# Altium PCB BOARD.PcbDoc
Units mm, origin at the board's own origin, x right, y up, seen from the top; angles counter-clockwise.
Board outline 80 x 40 mm, 2 copper layers (Top Layer, Bottom Layer), stack 1.18 mm thick; 120 components, 56 nets, 306 pads, 130 vias.
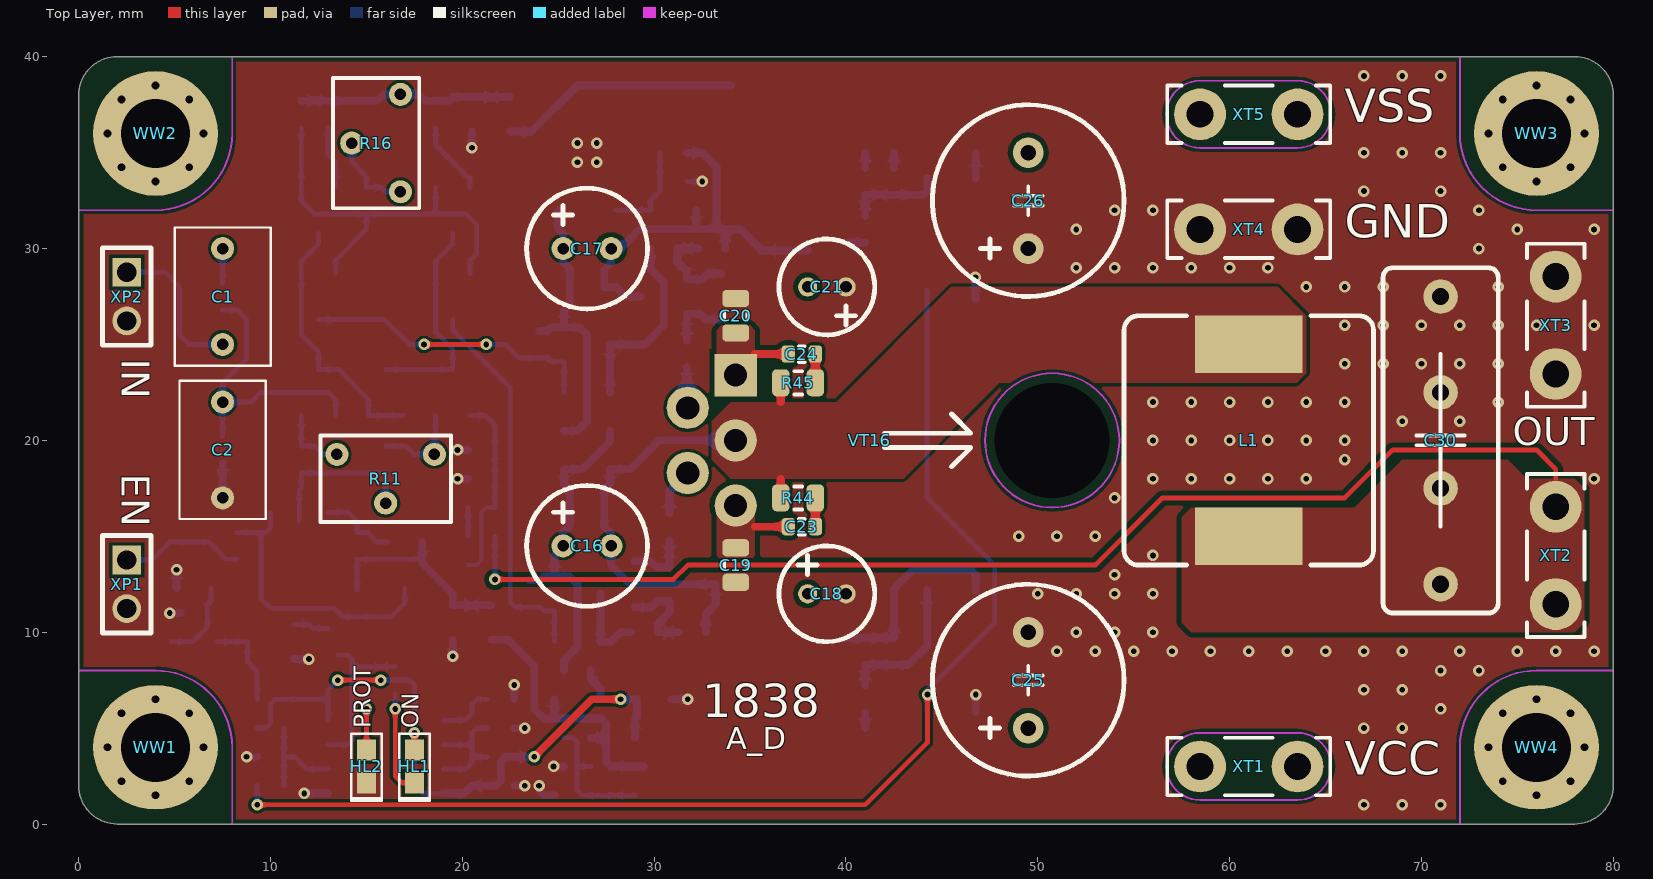
[diagram p0: Top Layer view]
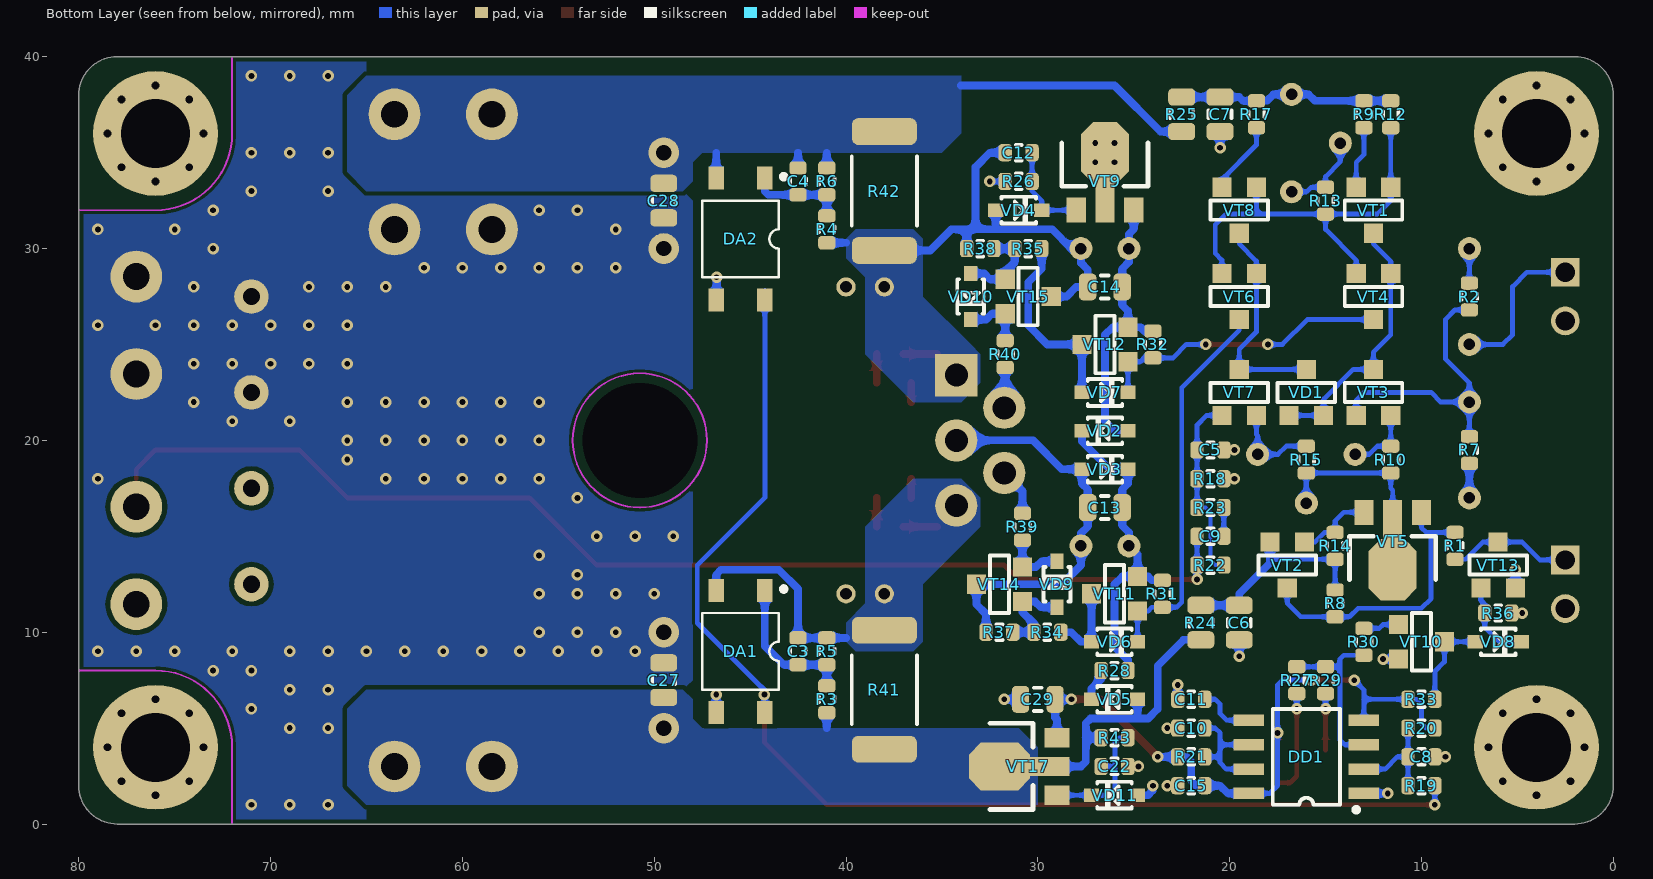
[diagram p1: Bottom Layer view, seen from below]
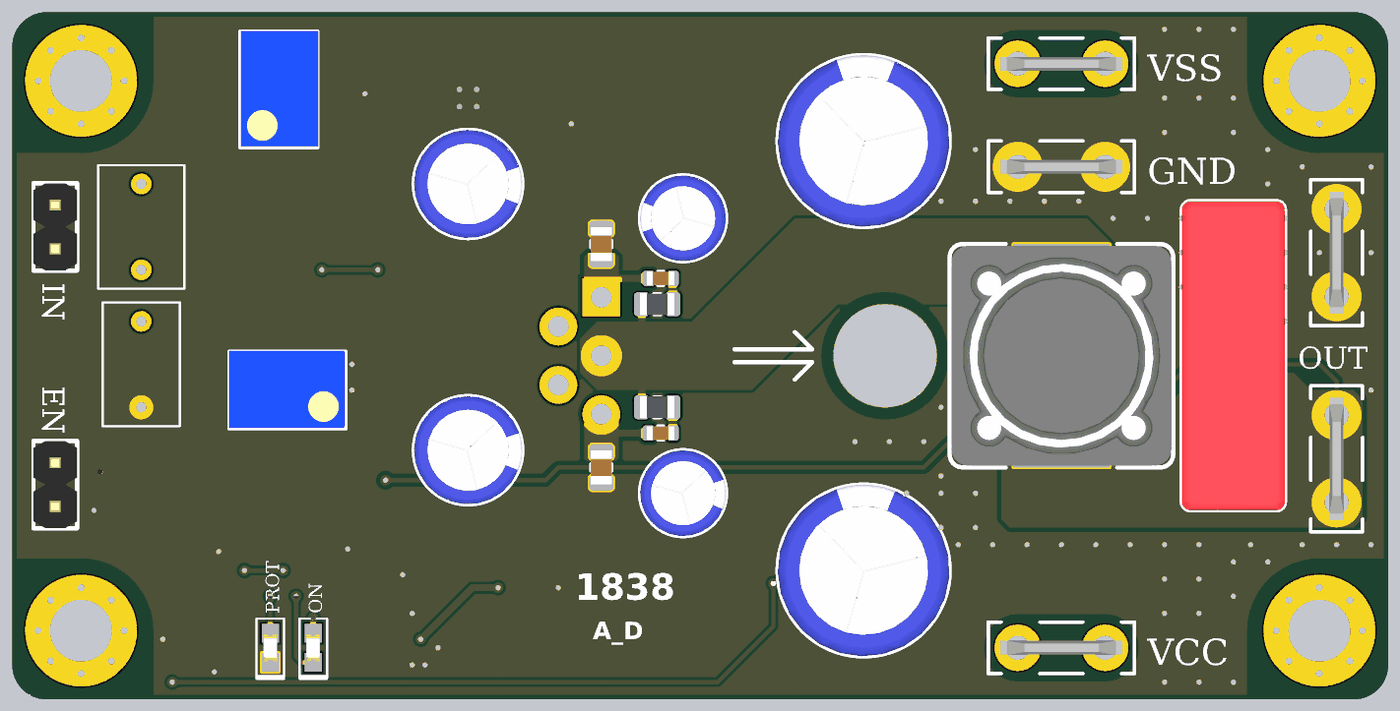
[diagram p2: 3D render of the assembled board from above, using the file's embedded part models]
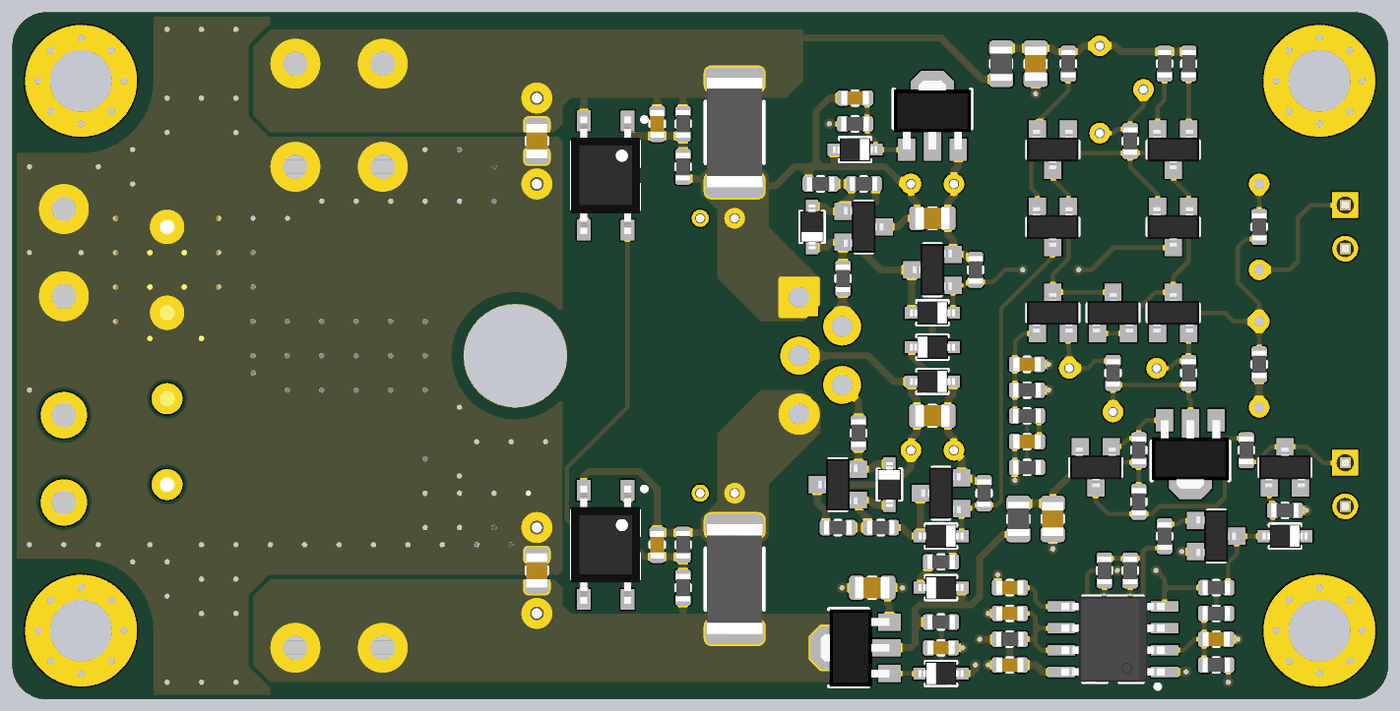
[diagram p3: 3D render of the assembled board from below, using the file's embedded part models]

## Layer stack, top to bottom
Top Solder: solder mask 0.01, Solder Resist, Dk 3.5
Top Layer: signal copper 0.03
Dielectric1: core 1.12, FR-4, Dk 4.2
Bottom Layer: signal copper 0.03
Bottom Solder: solder mask 0.01, Solder Resist, Dk 3.5

## Board outline
0,2 0,38 cw(c2,38) 2,40 78,40 cw(c78,38) 80,38 80,2 cw(c78,2) 78,0 2,0 cw(c2,2)

## Design rules (kind name [scope] priority, off if disabled: settings)
BoardOutlineClearance [All] p1: gap=0.25 ignorepadtopadclearanceinfootprint=FALSE
Clearance "Schematic Clearance Constraint_4" [InNet('VSS')] p1: gap=0.25 ignorepadtopadclearanceinfootprint=FALSE except(0: Arc-Hole Track-Hole SMDPad-Hole THPad-Hole Via-Hole Fill-Hole Poly-Hole Region-Hole Text-Hole)
Clearance "Schematic Clearance Constraint_3" [InNet('VSS_PROT')] p2: gap=0.25 ignorepadtopadclearanceinfootprint=FALSE except(0: Arc-Hole Track-Hole SMDPad-Hole THPad-Hole Via-Hole Fill-Hole Poly-Hole Region-Hole Text-Hole)
Clearance "Schematic Clearance Constraint_2" [InNet('VCC_PROT')] p3: gap=0.25 ignorepadtopadclearanceinfootprint=FALSE except(0: Arc-Hole Track-Hole SMDPad-Hole THPad-Hole Via-Hole Fill-Hole Poly-Hole Region-Hole Text-Hole)
Clearance "Schematic Clearance Constraint_1" [InNet('OUT_LP')] p4: gap=0.25 ignorepadtopadclearanceinfootprint=FALSE except(0: Arc-Hole Track-Hole SMDPad-Hole THPad-Hole Via-Hole Fill-Hole Poly-Hole Region-Hole Text-Hole)
Clearance "Schematic Clearance Constraint" [InNet('VCC')] p5: gap=0.25 ignorepadtopadclearanceinfootprint=FALSE except(0: Arc-Hole Track-Hole SMDPad-Hole THPad-Hole Via-Hole Fill-Hole Poly-Hole Region-Hole Text-Hole)
Clearance [All] p6: gap=0.152 ignorepadtopadclearanceinfootprint=FALSE
ComponentClearance [All] p1 off: gap=0.25 collisioncheckmode=3 verticalgap=0.25 showdistances=FALSE
DiffPairsRouting [All] p1: maxlimit=0.4 minlimit=0.15 mostfreqgap=0.25 toplayer_minwidth=0.2 toplayer_maxwidth=0.4 toplayer_prefwidth=0.25 bottomlayer_minwidth=0.2 bottomlayer_maxwidth=0.4 bottomlayer_prefwidth=0.25 maxuncoupledlength=12
Height [All] p1: minheight=0 maxheight=25 prefheight=25
HoleSize [All] p1: absolutevalues=TRUE maxlimit=6 minlimit=0.3 maxpercent=80.000 minpercent=20.000
HoleToHoleClearance [All] p1: gap=0.25 allowstackedmicrovias=TRUE
MinimumSolderMaskSliver [All] p1 off: minsoldermaskwidth=0.254
PlaneClearance [All] p1: clearance=0.5
PlaneConnect [All] p1: planeconnectstyle=Relief reliefexpansion=0.5 reliefentries=4 reliefconductorwidth=0.25 reliefairgap=0.25
PolygonConnect "Schematic Polygon Connect Style_7" [InNet('GND')] p1: connectstyle=Direct reliefconductorwidth=0.254 reliefentries=4 polygonreliefangle="45 Angle" airgapwidth=0.254
PolygonConnect "Schematic Polygon Connect Style_3" [InNet('OUT_LP')] p2: connectstyle=Direct reliefconductorwidth=0.254 reliefentries=4 polygonreliefangle="45 Angle" airgapwidth=0.254
PolygonConnect "Schematic Polygon Connect Style_6" [InNet('VCC')] p3: connectstyle=Direct reliefconductorwidth=0.254 reliefentries=4 polygonreliefangle="45 Angle" airgapwidth=0.254
PolygonConnect "Schematic Polygon Connect Style_5" [InNet('VSS_PROT')] p4: connectstyle=Direct reliefconductorwidth=0.254 reliefentries=4 polygonreliefangle="45 Angle" airgapwidth=0.254
PolygonConnect "Schematic Polygon Connect Style_4" [InNet('VSS')] p5: connectstyle=Direct reliefconductorwidth=0.254 reliefentries=4 polygonreliefangle="45 Angle" airgapwidth=0.254
PolygonConnect "Schematic Polygon Connect Style_1" [InNet('VCC_PROT')] p6: connectstyle=Direct reliefconductorwidth=0.254 reliefentries=4 polygonreliefangle="45 Angle" airgapwidth=0.254
PolygonConnect PolygonConnect_DirectConnect [InComponentClass('DirectConnect')] p7: connectstyle=Direct reliefconductorwidth=0.254 reliefentries=4 polygonreliefangle="90 Angle" airgapwidth=0.254
PolygonConnect PolygonConnect_Components [InComponent('C*') OR InComponent('R*') OR InComponent('NR*') OR InComponent('DA*') OR InComponent('DD*') OR InComponent('HL*')] p8: connectstyle=Relief reliefconductorwidth=0.2 reliefentries=4 polygonreliefangle="90 Angle" airgapwidth=0.25
PolygonConnect PolygonConnect_Connectors [All vs (InPadClass('All Pads'))] p9: connectstyle=Relief reliefconductorwidth=0.6 reliefentries=4 polygonreliefangle="90 Angle" airgapwidth=0.3
PolygonConnect PolygonConnect_Via [All] p10: connectstyle=Direct reliefconductorwidth=0.254 reliefentries=4 polygonreliefangle="90 Angle" airgapwidth=0.254
RoutingCorners [All] p1: cornerstyle=45-Degree minsetback=1.5 maxsetback=3.5
RoutingVias [All] p1: holewidth=0.6 width=1.2 viastyle="Through Hole" minholewidth=0.3 minwidth=0.6 maxholewidth=1 maxwidth=2
SMDEntry [All] p1: side=TRUE corner=TRUE anyangle=TRUE
SilkToSilkClearance [All] p1 off: silktosilkclearance=0.254
SilkToSolderMaskClearance [IsPad] p1 off: minsilkscreentomaskgap=0.254 clearancetoexposedcopper=TRUE
SolderMaskExpansion [All] p1: expansion=0.1
Width [All] p1: maxlimit=8 minlimit=0.2 preferedwidth=0.6
Width Width_TrackEnds [All] p2 off: maxlimit=0.25 minlimit=0.25 preferedwidth=0.25 checkconnectedcopper=TRUE
19 further rules are at their usual default settings.

## Classes and differential pairs
component class DirectConnect: C18 C19 C20 C21 C25 C26 C30 L1 VT16 XT1 XT2 XT3 XT4 XT5

## Components (designator, comment, footprint, x,y, rotation, side; value= is the part's Value field where it differs from the comment)
C1 "Capacitor" CAPF_050D500P720X500X1000 7.5,27.5 r90 top value=2.2uF
C2 "Capacitor" CAPF_050D500P720X450X600 7.5,19.5 r90 top value=100pF
C3 "Capacitor" C0603_L 42.5,9 r270 bottom value=1800pF
C4 "Capacitor" C0603_L 42.5,33.5 r270 bottom value=1800pF
C5 "Capacitor" C0603_L 21,19.5 r0 bottom value=22pF
C6 "Capacitor" C0805_L 19.5,10.5 r90 bottom value=0.1uF
C7 "Capacitor" C0805_L 20.5,37 r90 bottom value=0.1uF
C8 "Capacitor" C0603_L 10,3.5 r0 bottom value=0.47uF
C9 "Capacitor" C0603_L 21,15 r0 bottom value=22pF
C10 "Capacitor" C0603_L 22,5 r180 bottom value=1uF
C11 "Capacitor" C0603_L 22,6.5 r180 bottom value=1uF
C12 "Capacitor" C0603_L 31,35 r180 bottom value=1uF
C13 "Capacitor" C0805_L 26.5,16.5 r180 bottom value=0.1uF
C14 "Capacitor" C0805_L 26.5,28 r180 bottom value=0.1uF
C15 "Capacitor" C0603_L 22,2 r180 bottom value=0.47uF
C16 "Capacitor-E" CAPE_040D250P630X1100 26.5,14.5 r0 top value=100uF
C17 "Capacitor-E" CAPE_040D250P630X1100 26.5,30 r0 top value=100uF
C18 "Capacitor-E" CAPE_040D200P500X1100 39,12 r0 top value=22uF
C19 "Capacitor" C0805_L 34.25,13.5 r270 top value=0.1uF
C20 "Capacitor" C0805_L 34.25,26.5 r90 top value=0.1uF
C21 "Capacitor-E" CAPE_040D200P500X1100 39,28 r180 top value=22uF
C22 "Capacitor" C0603_L 26,3 r0 bottom value=1uF
C23 "Capacitor" C0603_L 37.7,15.5 r0 top value=100pF
C24 "Capacitor" C0603_L 37.7,24.5 r0 top value=100pF
C25 "Capacitor-E" CAPE_060D500P1000X2000 49.5,7.5 r90 top value=470uF
C26 "Capacitor-E" CAPE_060D500P1000X2000 49.5,32.5 r90 top value=470uF
C27 "Capacitor" C0805_L 49.5,7.5 r90 bottom value=0.1uF
C28 "Capacitor" C0805_L 49.5,32.5 r90 bottom value=0.1uF
C29 "Capacitor" C0805_L 30,6.5 r180 bottom value=10uF
C30 "Capacitor" CAPF_080D1500P1800X600X1250 71,20 r270 top value=0.68uF
DA1 "Photocoupler-4p" SOP-4_254P430X440X200_N 45.5,9 r0 bottom value=SFH690CT
DA2 "Photocoupler-4p" SOP-4_254P430X440X200_N 45.5,30.5 r0 bottom value=SFH690CT
DD1 "TIM-555" SOIC-8_127P490X391X155_N 16,3.5 r90 bottom value=NE555D
HL1 "ON" LD0603 17.5,3 r270 top value=BL-LS0603GC
HL2 "PROT" LD0603 15,3 r270 top value=BL-LS0603EC
L1 "Coil" B82477G4-Series 61,20 r270 top value=B82477G4103M000
R1 "Resistor" R0603_L 8.25,14.5 r270 bottom value=47k
R2 "Resistor" R0603_L 7.5,27.5 r270 bottom value=1k
R3 "Resistor" R0603_L 41,6.5 r90 bottom value=470
R4 "Resistor" R0603_L 41,31 r90 bottom value=470
R5 "Resistor" R0603_L 41,9 r270 bottom value=10k
R6 "Resistor" R0603_L 41,33.5 r270 bottom value=10k
R7 "Resistor" R0603_L 7.5,19.5 r90 bottom value=1.5k
R8 "Resistor" R0603_L 14.5,11.5 r90 bottom value=47k
R9 "Resistor" R0603_L 13,37 r270 bottom value=51
R10 "Resistor" R0603_L 11.6,19 r270 bottom value=47
R11 "Resistor-Trimmer-1" 3266W 16,18 r180 top value=500
R12 "Resistor" R0603_L 11.6,37 r270 bottom value=330
R13 "Resistor" R0603_L 15,32.5 r90 bottom value=100
R14 "Resistor" R0603_L 14.5,14.5 r270 bottom value=220
R15 "Resistor" R0603_L 16,19 r90 bottom value=47
R16 "Resistor-Trimmer-1" 3266W 15.5,35.5 r90 top value=5k
R17 "Resistor" R0603_L 18.6,37 r270 bottom value=51
R18 "Resistor" R0603_L 21,18 r0 bottom value=1.5k
R19 "Resistor" R0603_L 10,2 r0 bottom value=10
R20 "Resistor" R0603_L 10,5 r0 bottom value=1meg
R21 "Resistor" R0603_L 22,3.5 r180 bottom value=1meg
R22 "Resistor" R0603_L 21,13.5 r0 bottom value=8.2k
R23 "Resistor" R0603_L 21,16.5 r180 bottom value=1k
R24 "Resistor" R0805_L 21.5,10.5 r270 bottom value=10
R25 "Resistor" R0805_L 22.5,37 r270 bottom value=10
R26 "Resistor" R0603_L 31,33.5 r180 bottom value=8.2k
R27 "Resistor" R0603_L 16.5,7.5 r270 bottom value=2.2k
R28 "Resistor" R0603_L 26,8 r0 bottom value=4.7k
R29 "Resistor" R0603_L 15,7.5 r270 bottom value=2.2k
R30 "Resistor" R0603_L 13,9.5 r90 bottom value=10k
R31 "Resistor" R0603_L 23.5,12 r90 bottom value=470
R32 "Resistor" R0603_L 24,25 r90 bottom value=470
R33 "Resistor" R0603_L 10,6.5 r0 bottom value=22k
R34 "Resistor" R0603_L 29.5,10 r0 bottom value=30
R35 "Resistor" R0603_L 30.5,30 r0 bottom value=30
R36 "Resistor" R0603_L 6,11 r0 bottom value=10k
R37 "Resistor" R0603_L 32,10 r180 bottom value=390
R38 "Resistor" R0603_L 33,30 r180 bottom value=390
R39 "Resistor" R0603_L 30.8,15.5 r90 bottom value=0
R40 "Resistor" R0603_L 31.7,24.5 r270 bottom value=0
R41 "Resistor" R2512_L 38,7 r270 bottom value=0.33
R42 "Resistor" R2512_L 38,33 r270 bottom value=0.33
R43 "Resistor" R0603_L 26,4.5 r0 bottom value=8.2k
R44 "Resistor" R0805_L 37.5,17 r0 top value=10
R45 "Resistor" R0805_L 37.5,23 r180 top value=10
VD1 "Schottky_AC" SOT-23_190P290X160X145_N 16,22.5 r180 bottom value=BAT54S
VD2 "Diode" SOD-323 26.5,20.5 r0 bottom value=BAS316
VD3 "Zener" SOD-323 26.5,18.5 r180 bottom value=BZX384-C12
VD4 "Zener" SOD-323 31,32 r180 bottom value=BZX384-C12
VD5 "Diode" SOD-323 26,6.5 r0 bottom value=1N4148WS-7-F
VD6 "Diode" SOD-323 26,9.5 r180 bottom value=BAS316
VD7 "Diode" SOD-323 26.5,22.5 r180 bottom value=BAS316
VD8 "Diode" SOD-323 6,9.5 r180 bottom value=1N4148WS-7-F
VD9 "Diode" SOD-323 29,12.5 r90 bottom value=BAS316
VD10 "Diode" SOD-323 33.5,27.5 r270 bottom value=BAS316
VD11 "Zener" SOD-323 26,1.5 r0 bottom value=BZX384-C12
VT1 "BJT-NPN" SOT-23_190P290X160X145_N 12.5,32 r0 bottom value=BC847
VT2 "BJT-PNP" SOT-23_190P290X160X145_N 17,13.5 r0 bottom value=BC857
VT3 "BJT-PNP" SOT-23_190P290X160X145_N 12.5,22.5 r180 bottom value=MMBT5401
VT4 "BJT-NPN" SOT-23_190P290X160X145_N 12.5,27.5 r0 bottom value=MMBT5551
VT5 "BJT-PNP" SOT-89_150P460X260X170_N 11.5,14.5 r0 bottom value=BCX53
VT6 "BJT-NPN" SOT-23_190P290X160X145_N 19.5,27.5 r0 bottom value=MMBT5551
VT7 "BJT-PNP" SOT-23_190P290X160X145_N 19.5,22.5 r180 bottom value=MMBT5401
VT8 "BJT-NPN" SOT-23_190P290X160X145_N 19.5,32 r0 bottom value=BC847
VT9 "BJT-NPN" SOT-89_150P460X260X170_N 26.5,33.75 r180 bottom value=BCX56
VT10 "BJT-NPN" SOT-23_190P290X160X145_N 10,9.5 r270 bottom value=BC847
VT11 "BJT-PNP" SOT-23_190P290X160X145_N 26,12 r90 bottom value=BC807
VT12 "BJT-PNP" SOT-23_190P290X160X145_N 26.5,25 r90 bottom value=BC807
VT13 "BJT-NPN" SOT-23_190P290X160X145_N 6,13.5 r180 bottom value=BC847
VT14 "BJT-PNP" SOT-23_190P290X160X145_N 32,12.5 r90 bottom value=BC807
VT15 "BJT-PNP" SOT-23_190P290X160X145_N 30.5,27.5 r270 bottom value=BC807
VT16 "IRFI4212H-117P" TO-220-5-117-WB 42,20 r270 top locked
VT17 "BJT-NPN" SOT-89_150P460X260X170_N 30.75,3 r90 bottom value=BCX56
WW1 "NoBody" MH_M3.0 4,4 r0 top locked value=MOUNTINGHOLE
WW2 "NoBody" MH_M3.0 4,36 r0 top locked value=MOUNTINGHOLE
WW3 "NoBody" MH_M3.0 76,36 r0 top locked value=MOUNTINGHOLE
WW4 "NoBody" MH_M3.0 76,4 r0 top locked value=MOUNTINGHOLE
XP1 "EN" PLS-2 2.5,12.5 r270 top value=PLS-2
XP2 "IN" PLS-2 2.5,27.5 r270 top value=PLS-2
XT1 "VCC" 62650-1 61,3 r180 top value=62650-1
XT2 "OUT" 62650-1 77,14 r90 top value=62650-1
XT3 "GND" 62650-1 77,26 r270 top value=62650-1
XT4 "GND" 62650-1 61,31 r180 top value=62650-1
XT5 "VSS" 62650-1 61,37 r180 top value=62650-1

## Footprints (in the part's own frame and the unit in brackets; to place one, negate y for a bottom-side part, rotate by r counter-clockwise, add the part's x,y. Pads: shape width x height; smd on the part's side, far side on the other; paste and mask are expansions set on the pad)
3266W [mm]
  round 1.2 hole 0.6: 1(-2.54,-1.27) 2(0,1.27) 3(2.54,-1.27)
  silkscreen extent -3.4,-2.25 3.4,2.25, body extent -3.31,-2.29 3.39,2.2, height 8.35
62650-1 [mm]
  round 2.7 hole 1.4: 1(-2.54,0) 1(2.54,0)
  silkscreen extent -4.25,-1.5 4.25,1.5, body extent -3.56,-0.4 3.56,0.4, height 9.25
B82477G4-Series [mm] "Epcos"
  rect 3x5.6 smd: 1(-5,0) 2(5,0)
  silkscreen extent -6.5,-6.5 6.5,6.5, body extent -6.4,-6.4 6.4,6.4, height 8
C0603_L [mm] "Chip Capacitor; Body 1.6 x 0.8 mm (LxW typ)"
  rrect50% 0.7x0.9 smd: 1(-0.7,0) 2(0.7,0)
  silkscreen extent -0.15,-0.41 0.15,0.41, body extent -0.8,-0.4 0.8,0.4, height 0.91
C0805_L [mm] "Chip Capacitor; Body 2.0 x 1.2 mm (LxW typ)"
  rrect50% 0.9x1.4 smd: 1(-0.9,0) 2(0.9,0)
  silkscreen extent -0.2,-0.6 0.2,0.6, body extent -1,-0.62 1,0.63, height 1.01
CAPE_040D200P500X1100 [mm]
  round 1 hole 0.6: 1(-1,0) 2(1,0)
  silkscreen extent -2.5,-2.5 2.5,2.5, body extent -2.5,-2.5 2.5,2.5, height 11.1
CAPE_040D250P630X1100 [mm]
  round 1.2 hole 0.6: 1(-1.25,0) 2(1.25,0)
  silkscreen extent -3.15,-3.15 3.15,3.15, body extent -3.15,-3.15 3.15,3.15, height 11.1
CAPE_060D500P1000X2000 [mm]
  round 1.6 hole 0.8: 1(-2.5,0) 2(2.5,0)
  silkscreen extent -5,-5 5,5, body extent -5,-5 5,5, height 20.1
CAPF_050D500P720X450X600 [mm]
  round 1.2 hole 0.6: 1(-2.5,0) 2(2.5,0)
  silkscreen extent -3.6,-2.25 3.6,2.25, body extent -3.5,-2.25 3.5,2.25, height 6
CAPF_050D500P720X500X1000 [mm]
  round 1.2 hole 0.6: 1(-2.5,0) 2(2.5,0)
  silkscreen extent -3.6,-2.5 3.6,2.5, body extent -3.5,-2.5 3.5,2.5, height 10
CAPF_080D1500P1800X600X1250 [mm]
  round 1.8 hole 0.9: 1(-7.5,0) 2(7.5,0)
  silkscreen extent -9,-3 9,3, body extent -9,-3 9,3, height 12.55
LD0603 [mm]
  rect 1.1x1 smd: 1(-0.85,0) 2(0.85,0)
  silkscreen extent -1.7,-0.8 1.8,0.8, body extent -0.8,-0.4 0.8,0.4, height 0.7
MH_M3.0 [mm] "Mounting hole M3"
  round 0.4 hole 0.4 paste-10: MH(-2.5,0) MH(-1.768,1.768) MH(-1.768,-1.768) MH(0,2.5) MH(0,-2.5) MH(1.768,1.768) MH(1.768,-1.768) MH(2.5,0)
  round 6.5 hole 3.6 paste-10: MH(0,0)
PLS-2 [mm]
  rect 1.5x1.5 hole 1: 1(-1.27,0)
  round 1.5 hole 1: 2(1.27,0)
  silkscreen extent -2.54,-1.27 2.54,1.27, body extent -2.54,-1.27 2.54,1.27, height 8.9
R0603_L [mm] "Chip Resistor; Body 1.6 x 0.8 mm (LxW typ)"
  rrect50% 0.7x0.9 smd: 1(-0.7,0) 2(0.7,0)
  silkscreen extent -0.15,-0.41 0.15,0.41, body extent -0.8,-0.41 0.8,0.41, height 0.46
R0805_L [mm] "Chip Resistor; Body 2.0 x 1.2 mm (LxW typ)"
  rrect50% 0.9x1.4 smd: 1(-0.9,0) 2(0.9,0)
  silkscreen extent -0.2,-0.6 0.2,0.6, body extent -1,-0.64 1,0.64, height 0.61
R2512_L [mm] "6432M"
  rrect50% 1.4x3.4 smd: 1(-3.1,0) 2(3.1,0)
  silkscreen extent -1.8,-1.7 1.8,1.7, body extent -3.2,-1.61 3.2,1.61, height 0.61
SOD-323 [mm]
  rect 0.8x0.7 smd: 1(-1.2,0) 2(1.2,0)
  silkscreen extent -0.9,-0.7 0.9,0.7, body extent -1.3,-0.67 1.3,0.68, height 1.1
SOIC-8_127P490X391X155_N [mm] "4320.8-А Small Outline; 8 Leads; Body Width 3.9 mm; Pitch 1.27 mm"
  rect 0.6x1.6 smd: 1(-1.905,-3) 2(-0.635,-3) 3(0.635,-3) 4(1.905,-3) 5(1.905,3) 6(0.635,3) 7(-0.635,3) 8(-1.905,3)
  silkscreen extent -2.88,-2.72 2.5,1.75, body extent -2.5,-3.01 2.5,3.01, height 1.75
SOP-4_254P430X440X200_N [mm]
  rect 0.8x1.2 smd: 1(-1.27,-3.175) 2(1.27,-3.175) 3(1.27,3.175) 4(-1.27,3.175)
  silkscreen extent -2.37,-3.37 2,2, body extent -2,-3.43 2,3.43, height 2.04
SOT-23_190P290X160X145_N [mm] "КТ-46"
  rect 1x1 smd: 1(-0.9,-1.2) 2(0,1.2) 3(0.9,-1.2)
  silkscreen extent -1.5,-0.5 1.5,0.5, body extent -1.5,-1.15 1.5,1.15, height 1.11
SOT-89_150P460X260X170_N [mm]
  rect 1x1.3 smd: 1(-1.5,-1.75) 3(1.5,-1.75)
  rect 1x2.2 smd: 2(0,-1.3)
  oct 2.5x3.2 smd: 2(0,1.25)
  silkscreen extent -2.25,-0.5 2.25,1.75, body extent -2.25,-1.75 2.25,2.25, height 1.51
TO-220-5-117-WB [mm] "PENTAWATT, 1501.5-3, Horizontal Mount"
  round 0.1 hole 6: 0(0,8.75)
  rect 2.2x2.2 hole 1.2: 1(-3.4,-7.75)
  round 2.2 hole 1.2: 2(-1.7,-10.25) 3(0,-7.75) 4(1.7,-10.25) 5(3.4,-7.75)
  body extent -5,-4.25 5,11.75, height 4.83

## Part data
C1: library part MKS2B042201F00JSSD, Dielectric Type="PET Film", Manufacturer=WIMA, Tolerance=±5%, Voltage=50V, Working Temperature Max=+100°С, Working Temperature Min=-55°С, Application Category=1, ID=1, Part Number=MKS2B042201F00JSSD, Published=18.05.2010, Publisher="Andrew Danich", Type=Конденсатор
C2: library part FKP2D001001D00JSSD, Dielectric Type="PET Film", Manufacturer=WIMA, Tolerance=±5%, Voltage=100V, Working Temperature Max=+100°С, Working Temperature Min=-55°С, Application Category=1, ID=3, Part Number=FKP2D001001D00JSSD, Published=18.05.2010, Publisher="Andrew Danich", Type=Конденсатор
C3 C4: library part GRM188R71H182JA01D, Dielectric Type=X7R, Manufacturer=Murata, Tolerance=±5%, Voltage=50V, Working Temperature Max=+125°С, Working Temperature Min=-55°С, Application Category=1, ID=208, Part Number=GRM188R71H182JA01D, Published=18.05.2010, Publisher="Andrew Danich", Type=Конденсатор
C5 C9: library part GRM1885C1H220JA01D, Dielectric Type=NP0, Manufacturer=Murata, Tolerance=±5%, Voltage=50V, Working Temperature Max=+125°С, Working Temperature Min=-55°С, Application Category=1, ID=122, Part Number=GRM1885C1H220JA01D, Published=18.05.2010, Publisher="Andrew Danich", Type=Конденсатор
C6 C7 C13 C14 C19 C20 C27 C28: library part GCJ21BR72A104KA01L, Dielectric Type=X7R, Manufacturer=Murata, Tolerance=±10%, Voltage=100V, Working Temperature Max=+125°С, Working Temperature Min=-55°С, Application Category=1, ID=138, Part Number=GCJ21BR72A104KA01L, Published=18.05.2010, Publisher="Andrew Danich", Type=Конденсатор
  C19 C20: ClassName=DirectConnect
C8 C15: library part GCJ188R71C474KA12D, Dielectric Type=X7R, Manufacturer=Murata, Tolerance=±10%, Voltage=16V, Working Temperature Max=+125°С, Working Temperature Min=-55°С, Application Category=1, ID=133, Part Number=GCJ188R71C474KA12D, Published=18.05.2010, Publisher="Andrew Danich", Type=Конденсатор
C10 C11 C12 C22: library part GCM188R71E105KA64D, Dielectric Type=X7R, Manufacturer=Murata, Tolerance=±10%, Voltage=25V, Working Temperature Max=+85°С, Working Temperature Min=-55°С, Application Category=1, ID=134, Part Number=GCM188R71E105KA64D, Published=18.05.2010, Publisher="Andrew Danich", Type=Конденсатор
C16 C17: library part TKR101M1VE11, Manufacturer=Jamicon, Tolerance=±20%, Voltage=35V, Working Temperature Max=+105°С, Working Temperature Min=-55°С, Application Category=1, ID=2, Part Number=TKR101M1VE11, Published=20.08.2010, Publisher="Andrew Danich", Type=Конденсатор
C18 C21: library part TKR220M1JD11, Manufacturer=Jamicon, Tolerance=±20%, Voltage=63V, Working Temperature Max=+105°С, Working Temperature Min=-55°С, Application Category=1, ClassName=DirectConnect, ID=4, Part Number=TKR220M1JD11, Published=20.08.2010, Publisher="Andrew Danich", Type=Конденсатор
C23 C24: library part GCM1885C2A101JA16D, Dielectric Type=NP0, Manufacturer=Murata, Tolerance=±5%, Voltage=100V, Working Temperature Max=+125°С, Working Temperature Min=-55°С, Application Category=1, ID=155, Part Number=GCM1885C2A101JA16D, Published=18.05.2010, Publisher="Andrew Danich", Type=Конденсатор
C25 C26: library part TKR471M1HG20, Manufacturer=Jamicon, Tolerance=±20%, Voltage=50V, Working Temperature Max=+105°С, Working Temperature Min=-55°С, Application Category=1, ClassName=DirectConnect, ID=3, Part Number=TKR471M1HG20, Published=20.08.2010, Publisher="Andrew Danich", Type=Конденсатор
C29: library part GRM21BR61E106KA73L, Dielectric Type=X5R, Manufacturer=Murata, Tolerance=±10%, Voltage=25V, Application Category=1, ID=53, Part Number=GRM21BR61E106KA73L, Published=18.05.2010, Publisher="Andrew Danich", Type=Конденсатор
C30: library part MKS4D036804C00KSP1, Dielectric Type="PET Film", Manufacturer=WIMA, Tolerance=±5%, Voltage=100V, Working Temperature Max=+100°С, Working Temperature Min=-55°С, Application Category=1, ClassName=DirectConnect, ID=4, Part Number=MKS4D036804C00KSP1, Published=18.05.2010, Publisher="Andrew Danich", Type=Конденсатор
DA1 DA2: library part SFH690CT, Current Transfer Ratio=100…200%, Input Current=50mA, Input Voltage=1.4V, Manufacturer="Vishay Semiconductors", Output Voltage=70V, Total Power Dissipation=150mW, Working Temperature Max=+100°С, Working Temperature Min=-55°С, Application Category=1, ID=8, Output Current=50mA, Part Number=SFH690CT, Published=09.01.2017, Publisher="Andrew Danich", Type=Микросхема
DD1: library part NE555D, Manufacturer="Texas Instruments", Output Current=200mA, Supply Current=15mA, Application Category=1, Functional Analog="SA555D, SE555D", ID=2, Part Number=NE555D, Published=07.08.2015, Publisher="Andrew Danich", Series Type="Timer 555", Supply Operation=+4.5…16V, Type=Микросхема, № of Elements=1
HL1: library part BL-LS0603GC, Color=Green, Forward Current=30mA, Forward Voltage=2.3V, Power Dissipation=65mW, Application Category=1, ID=14, Leds=1, Part Number=BL-LS0603GC, Published=03.12.2013, Publisher="Andrew Danich", Type="Индикатор единичный"
HL2: library part BL-LS0603EC, Color=Orange, Forward Current=30mA, Forward Voltage=2.1V, Power Dissipation=65mW, Application Category=1, ID=15, Leds=1, Part Number=BL-LS0603EC, Published=03.12.2013, Publisher="Andrew Danich", Type="Индикатор единичный"
L1: library part B82477G4103M000, DC Resistance=0.022ohm, Inductance=10uH, Manufacturer=Epcos, Rated Current=5.4A, Tolerance=±20%, Working Temperature Max=+125°С, Working Temperature Min=-55°С, Application Category=1, ClassName=DirectConnect, ID=27, Part Number=B82477G4103M000, Published=20.05.2010, Publisher="Andrew Danich", Type=Дроссель
R1 R8: library part RC0603JR-0747KL, Limit Voltage=50V, Manufacturer=Yageo, Temperature Coefficient=100ppm, Tolerance=±5%, Total Power Dissipation=0.1W, Working Temperature Max=+155°С, Working Temperature Min=-55°С, Application Category=1, ID=63, Part Number=RC0603JR-0747KL, Published=24.03.2010, Publisher="Andrew Danich", Series Type=Thick-Film, Type=Резистор
R2 R23: library part RC0603JR-071KL, Limit Voltage=50V, Manufacturer=Yageo, Temperature Coefficient=100ppm, Tolerance=±5%, Total Power Dissipation=0.1W, Working Temperature Max=+155°С, Working Temperature Min=-55°С, Application Category=1, Functional Analog=CR0603-JW-102E, ID=19, Part Number=RC0603JR-071KL, Published=24.03.2010, Publisher="Andrew Danich", Series Type=Thick-Film, Type=Резистор
R3 R4 R31 R32: library part RC0603JR-07470R, Limit Voltage=50V, Manufacturer=Yageo, Temperature Coefficient=100ppm, Tolerance=±5%, Total Power Dissipation=0.1W, Working Temperature Max=+155°С, Working Temperature Min=-55°С, Application Category=1, ID=61, Part Number=RC0603JR-07470R, Published=24.03.2010, Publisher="Andrew Danich", Series Type=Thick-Film, Type=Резистор
R5 R6 R30 R36: library part RC0603JR-0710KL, Limit Voltage=50V, Manufacturer=Yageo, Temperature Coefficient=100ppm, Tolerance=±5%, Total Power Dissipation=0.1W, Working Temperature Max=+155°С, Working Temperature Min=-55°С, Application Category=1, Functional Analog=CR0603-JW-103E, ID=12, Part Number=RC0603JR-0710KL, Published=24.03.2010, Publisher="Andrew Danich", Series Type=Thick-Film, Type=Резистор
R7 R18: library part RC0603JR-071K5L, Limit Voltage=50V, Manufacturer=Yageo, Temperature Coefficient=100ppm, Tolerance=±5%, Total Power Dissipation=0.1W, Working Temperature Max=+155°С, Working Temperature Min=-55°С, Application Category=1, ID=8, Part Number=RC0603JR-071K5L, Published=24.03.2010, Publisher="Andrew Danich", Series Type=Thick-Film, Type=Резистор
R9 R17: library part RC0603JR-0751RL, Limit Voltage=50V, Manufacturer=Yageo, Temperature Coefficient=100ppm, Tolerance=±5%, Total Power Dissipation=0.1W, Working Temperature Max=+155°С, Working Temperature Min=-55°С, Application Category=1, Functional Analog=CR0603-JW-510E, ID=314, Part Number=RC0603JR-0751RL, Published=24.03.2010, Publisher="Andrew Danich", Series Type=Thick-Film, Type=Резистор
R10 R15: library part RC0603JR-0747RL, Limit Voltage=50V, Manufacturer=Yageo, Temperature Coefficient=100ppm, Tolerance=±5%, Total Power Dissipation=0.1W, Working Temperature Max=+155°С, Working Temperature Min=-55°С, Application Category=1, ID=60, Part Number=RC0603JR-0747RL, Published=24.03.2010, Publisher="Andrew Danich", Series Type=Thick-Film, Type=Резистор
R11: library part 3266W-1-501, Limit Voltage=250V, Manufacturer=Bourns, Temperature Coefficient=100ppm, Tolerance=±10%, Total Power Dissipation=0.25W, Working Temperature Max=+125°С, Working Temperature Min=-55°С, Application Category=1, Channel=1, Functional Analog=3266X-1-501LF, ID=5, Part Number=3266W-1-501, Published=27.07.2015, Publisher="Andrew Danich", Taper Type=Linear, Type="Подстроечный резистор"
R12: library part RC0603JR-07330RL, Limit Voltage=50V, Manufacturer=Yageo, Temperature Coefficient=100ppm, Tolerance=±5%, Total Power Dissipation=0.1W, Working Temperature Max=+155°С, Working Temperature Min=-55°С, Application Category=1, Functional Analog=CR0603-JW-331E, ID=313, Part Number=RC0603JR-07330RL, Published=24.03.2010, Publisher="Andrew Danich", Series Type=Thick-Film, Type=Резистор
R13: library part RC0603JR-07100R, Limit Voltage=50V, Manufacturer=Yageo, Temperature Coefficient=100ppm, Tolerance=±5%, Total Power Dissipation=0.1W, Working Temperature Max=+155°С, Working Temperature Min=-55°С, Application Category=1, Functional Analog=CR0603-JW-101E, ID=10, Part Number=RC0603JR-07100R, Published=24.03.2010, Publisher="Andrew Danich", Series Type=Thick-Film, Type=Резистор
R14: library part RC0603JR-07220R, Limit Voltage=50V, Manufacturer=Yageo, Temperature Coefficient=100ppm, Tolerance=±5%, Total Power Dissipation=0.1W, Working Temperature Max=+155°С, Working Temperature Min=-55°С, Application Category=1, ID=30, Part Number=RC0603JR-07220R, Published=24.03.2010, Publisher="Andrew Danich", Series Type=Thick-Film, Type=Резистор
R16: library part 3266W-1-502, Limit Voltage=250V, Manufacturer=Bourns, Temperature Coefficient=100ppm, Tolerance=±10%, Total Power Dissipation=0.25W, Working Temperature Max=+125°С, Working Temperature Min=-55°С, Application Category=1, Channel=1, Functional Analog=3266X-1-501LF, ID=6, Part Number=3266W-1-502, Published=27.07.2015, Publisher="Andrew Danich", Taper Type=Linear, Type="Подстроечный резистор"
R19: library part RC0603JR-0710RL, Limit Voltage=50V, Manufacturer=Yageo, Temperature Coefficient=100ppm, Tolerance=±5%, Total Power Dissipation=0.1W, Working Temperature Max=+155°С, Working Temperature Min=-55°С, Application Category=1, Functional Analog=CR0603-JW-100E, ID=9, Part Number=RC0603JR-0710RL, Published=24.03.2010, Publisher="Andrew Danich", Series Type=Thick-Film, Type=Резистор
R20 R21: library part RC0603JR-071ML, Limit Voltage=50V, Manufacturer=Yageo, Temperature Coefficient=100ppm, Tolerance=±5%, Total Power Dissipation=0.1W, Working Temperature Max=+155°С, Working Temperature Min=-55°С, Application Category=1, ID=20, Part Number=RC0603JR-071ML, Published=24.03.2010, Publisher="Andrew Danich", Series Type=Thick-Film, Type=Резистор
R22 R26 R43: library part RC0603JR-078K2L, Limit Voltage=50V, Manufacturer=Yageo, Temperature Coefficient=100ppm, Tolerance=±5%, Total Power Dissipation=0.1W, Working Temperature Max=+155°С, Working Temperature Min=-55°С, Application Category=1, ID=82, Part Number=RC0603JR-078K2L, Published=24.03.2010, Publisher="Andrew Danich", Series Type=Thick-Film, Type=Резистор
R24 R25 R44 R45: library part RC0805JR-0710RL, Limit Voltage=150V, Manufacturer=Yageo, Temperature Coefficient=100ppm, Tolerance=±5%, Total Power Dissipation=0.125W, Working Temperature Max=+155°С, Working Temperature Min=-55°С, Application Category=1, ID=96, Part Number=RC0805JR-0710RL, Published=24.03.2010, Publisher="Andrew Danich", Series Type=Thick-Film, Type=Резистор
R27 R29: library part RC0603JR-072K2L, Limit Voltage=50V, Manufacturer=Yageo, Temperature Coefficient=100ppm, Tolerance=±5%, Total Power Dissipation=0.1W, Working Temperature Max=+155°С, Working Temperature Min=-55°С, Application Category=1, ID=22, Part Number=RC0603JR-072K2L, Published=24.03.2010, Publisher="Andrew Danich", Series Type=Thick-Film, Type=Резистор
R28: library part RC0603JR-074K7L, Limit Voltage=50V, Manufacturer=Yageo, Temperature Coefficient=100ppm, Tolerance=±5%, Total Power Dissipation=0.1W, Working Temperature Max=+155°С, Working Temperature Min=-55°С, Application Category=1, ID=56, Part Number=RC0603JR-074K7L, Published=24.03.2010, Publisher="Andrew Danich", Series Type=Thick-Film, Type=Резистор
R33: library part RC0603JR-0722KL, Limit Voltage=50V, Manufacturer=Yageo, Temperature Coefficient=100ppm, Tolerance=±5%, Total Power Dissipation=0.1W, Working Temperature Max=+155°С, Working Temperature Min=-55°С, Application Category=1, ID=32, Part Number=RC0603JR-0722KL, Published=24.03.2010, Publisher="Andrew Danich", Series Type=Thick-Film, Type=Резистор
R34 R35: library part RC0603JR-0730RL, Limit Voltage=50V, Manufacturer=Yageo, Temperature Coefficient=100ppm, Tolerance=±5%, Total Power Dissipation=0.1W, Working Temperature Max=+155°С, Working Temperature Min=-55°С, Application Category=1, ID=412, Part Number=RC0603JR-0730RL, Published=24.03.2010, Publisher="Andrew Danich", Series Type=Thick-Film, Type=Резистор
R37 R38: library part RC0603FR-07390RL, Limit Voltage=50V, Manufacturer=Yageo, Temperature Coefficient=100ppm, Tolerance=±1%, Total Power Dissipation=0.1W, Working Temperature Max=+155°С, Working Temperature Min=-55°С, Application Category=1, ID=306, Part Number=RC0603FR-07390RL, Published=24.03.2010, Publisher="Andrew Danich", Series Type=Thick-Film, Type=Резистор
R39 R40: library part RC0603JR-070R, Limit Voltage=50V, Manufacturer=Yageo, Temperature Coefficient=100ppm, Tolerance=±5%, Total Power Dissipation=0.1W, Working Temperature Max=+155°С, Working Temperature Min=-55°С, Application Category=1, Functional Analog="RC0603FR-070RL, CR0603-J/-000E", ID=5, Part Number=RC0603JR-070R, Published=24.03.2010, Publisher="Andrew Danich", Series Type=Thick-Film, Type=Резистор
R41 R42: library part RL2512FK-070R33L, Limit Voltage=200V, Manufacturer=Yageo, Temperature Coefficient=100ppm, Tolerance=±1%, Total Power Dissipation=1W, Working Temperature Max=+155°С, Working Temperature Min=-55°С, Application Category=1, ID=220, Part Number=RL2512FK-070R33L, Published=24.03.2010, Publisher="Andrew Danich", Series Type=Thick-Film, Type=Резистор
VD1: library part BAT54S, Capacitance=10pF, Forward Current=200mA, Forward Voltage=0.5V, Manufacturer="NXP Semiconductors", Max Operating Frequency=5nS, Reverse Current=2uA, Reverse Voltage=30V, Total Power Dissipation=290mW, Working Temperature Max=+150°С, Working Temperature Min=-55°С, Application Category=1, ID=14, Part Number=BAT54S, Published=08.08.2014, Publisher="Andrew Danich", Type="Сборка диодная"
VD2 VD6 VD7 VD9 VD10: library part BAS316, Forward Current=250mA, Manufacturer=NXP, Reverse Current=0.5uA, Reverse Voltage=100V, Total Power Dissipation=400mW, Application Category=1, ID=14, Part Number=BAS316, Published=18.05.2010, Publisher="Andrew Danich", Recovery Time=4nS, Type=Диод
VD3 VD4 VD11: library part BZX384-C12, Capacitance=85pF, Differential resistance=150ohm, Forward Current=250mA, Forward Voltage=0.9V, Manufacturer=NXP, Reverse Current=0.1uA, Total Power Dissipation=300mW, Working Temperature Max=+150°С, Working Temperature Min=-65°С, Working Voltage=12V, Application Category=1, ID=20, Part Number=BZX384-C12, Published=20.05.2013, Publisher="Andrew Danich", Type=Стабилитрон
VD5 VD8: library part 1N4148WS-7-F, Capacitance=2pF, Forward Current=150mA, Forward Voltage=1V, Manufacturer="Diodes Incorporated", Reverse Current=1uA, Reverse Voltage=100V, Total Power Dissipation=200mW, Working Temperature Max=+150°С, Working Temperature Min=-55°С, Application Category=1, Functional Analog=1N4148WS, ID=13, Part Number=1N4148WS-7-F, Published=18.05.2010, Publisher="Andrew Danich", Recovery Time=4nS, Type=Диод
VT1 VT8 VT10 VT13: library part BC847, C-E Saturation Voltage=0.6V, C-E Voltage=45V, Collector Current=100mA, DC Current Gain=110…800, Total Power Dissipation=250mW, Transition Frequency=100MHz, Application Category=1, ID=1, Part Number=BC847, Published=07.05.2013, Publisher="Andrew Danich", Type=Транзистор
VT2: library part BC857, C-E Saturation Voltage=0.6V, C-E Voltage=45V, Collector Current=100mA, DC Current Gain=125…800, Total Power Dissipation=250mW, Transition Frequency=100MHz, Application Category=1, ID=2, Part Number=BC857, Published=07.05.2013, Publisher="Andrew Danich", Type=Транзистор
VT3 VT7: library part MMBT5401, C-E Saturation Voltage=0.5V, C-E Voltage=160V, Collector Current=600mA, DC Current Gain=60…240, Total Power Dissipation=350mW, Transition Frequency=100MHz, Application Category=1, ID=8, Part Number=MMBT5401, Published=07.05.2013, Publisher="Andrew Danich", Type=Транзистор
VT4 VT6: library part MMBT5551, C-E Saturation Voltage=0.2V, C-E Voltage=160V, Collector Current=600mA, DC Current Gain=50…250, Total Power Dissipation=350mW, Transition Frequency=100MHz, Application Category=1, ID=7, Part Number=MMBT5551, Published=07.05.2013, Publisher="Andrew Danich", Type=Транзистор
VT5: library part BCX53, C-E Voltage=80V, Collector Current=1A, Application Category=1, ID=4, Part Number=BCX53, Published=07.05.2013, Publisher="Andrew Danich", Type=Транзистор
VT9 VT17: library part BCX56, C-E Voltage=80V, Collector Current=1A, Application Category=1, ID=3, Part Number=BCX56, Published=07.05.2013, Publisher="Andrew Danich", Type=Транзистор
VT11 VT12 VT14 VT15: library part BC807, C-E Saturation Voltage=0.7V, C-E Voltage=45V, Collector Current=500mA, DC Current Gain=100…600, Manufacturer=NXP, Total Power Dissipation=250mW, Transition Frequency=80MHz, Working Temperature Max=+150°С, Working Temperature Min=-65°С, Application Category=1, Functional Analog=BC807-40, ID=15, Part Number=BC807, Published=07.05.2013, Publisher="Andrew Danich", Type=Транзистор
VT16: D-S On-Resistance=0.058omh, D-S Voltage=100V, Drain Current=11A, Gate Capacitance=490pF, Gate Threshold Voltage=5V, Manufacturer=Infineon, Thermal Resistance to Case=7.1°C/W, Total Power Dissipation=18W, Working Temperature Max=+150°C, Working Temperature Min=-55°C, Application Category=1, ClassName=DirectConnect, ID=1, Part Number=IRFI4212H-117P, Published=14.09.2018, Publisher="Andrew Danich", Type="Сборка транзисторная"
WW1 WW2 WW3 WW4: library part MOUNTINGHOLE, ID=1, Part Number=MOUNTINGHOLE, Published=24.03.2015, Publisher="Andrew Danich", Type=Лепесток
XP1 XP2: library part PLS-2, Limit Current=3A, Limit Voltage=250V, Resistance=15momh, Application Category=1, Connector Type=Male, ID=1, Part Number=PLS-2, Pins=2, Pitch=2.54mm, Published=07.03.2013, Publisher="Andrew Danich", Surface Finish=Gold, Type=Вилка
XT1 XT2 XT3 XT4 XT5: library part 62650-1, Manufacturer="TE Connectivity", Application Category=1, ClassName=DirectConnect, ID=20, Part Number=62650-1, Pins=2, Pitch=5.08mm, Published=27.07.2015, Publisher="Andrew Danich", Type="Клеммный соединитель"

## Free pads (board coordinates)
  round 1.8 hole 0.9: 0(71,17.5) 0(71,22.5)

## Via types
v1: diameter 0.6, hole 0.3, Top Layer to Bottom Layer, tented both sides, 130 vias

## Nets (pads, with @x,y where several pads share a name; then routed paths per layer and width w, separated by ;. In a path a pad name is that pad's centre, name@x,y a point inside that pad or via, vN(x,y) a via of type N, cw(c..) or ccw(c..) an arc to the next point about the centre after c; other vN are vias at no path point)
EN: R1.2 VT13.2 XP1.1 | length 6.5
  Bottom Layer w0.25: XP1.1 3.82,13.77 4.75,14.7 VT13.2 6.8,14.7 7.7,13.8 R1.2
GND: C2.1 C5.1 C6.1 C7.1 C8.1 C10.1 C11.1 C15.1 C18.2 C19.2 C20.2 C21.1 C22.1 C25.2 C26.1 C27.2 C28.1 C29.1 C30.1 DA1.3 DA2.3 DD1.1 HL2.2 pad.0@71,22.5 R7.1 R18.1 R26.1 R36.1 VD11.1 VT9.2 VT10.3 VT13.3 XP1.2 XP2.2 XT3.1 XT4.1 | length 16
  Bottom Layer w0.25: R26.1 v1(32.5,33.5)
  Bottom Layer w0.4: v1(4.75,11) R36.1 ; VT13.3 v1(5.1,13.25) ; C2.1 R7.1 ; v1(8.75,3.5) C8.1 ; VT10.3 v1(12,8.6) ; v1(11.75,1.595) DD1.1 ; v1(19.5,8.75) C6.1 ; v1(19.75,18) R18.1 ; v1(19.75,19.5) C5.1 ; v1(20.5,35.25) C7.1 ; C15.1 v1(23.25,2) ; C10.1 v1(23.25,5) ; C11.1 v1(22.7,7.25) ; v1(24,2) 24,1.75 24.25,1.5 VD11.1 ; v1(24.754,3) C22.1 ; C29.1 v1(31.75,6.5) ; v1(46.75,28.5) 46.75,27.345 DA2.3 ; DA1.3 v1(46.77,6.75)
  other v1: 67,1 69,1 71,1 67,5 69,5 71,6 67,7 69,7 71,8 73,8 51,9 53,9 55,9 57,9 59,9 61,9 63,9 65,9 67,9 69,9 72,9 75,9 77,9 79,9 52,10 54,10 56,10 50,12 52,12 54,12 56,12 54,13 56,14 49,15 51,15 53,15 54,17 56,18 58,18 60,18 62,18 64,18 79,18 66,19 56,20 58,20 60,20 62,20 64,20 66,20 69,21 72,21 56,22 58,22 60,22 62,22 64,22 66,22 74,22 66,24 68,24 70,24 72,24 74,24 66,26 68,26 70,26 72,26 74,26 76,26 79,26 64,28 66,28 68,28 74,28 52,29 54,29 56,29 58,29 60,29 62,29 73,30 52,31 75,31 79,31 54,32 56,32 73,32 67,33 71,33 26,34.5 27,34.5 67,35 69,35 71,35 26,35.5 27,35.5 67,39 69,39 71,39
NetC1_1: C1.1 XP2.1 | length 8
  Bottom Layer w0.25: XP2.1 4.5,28.77 5.25,28.02 5.25,25.5 5.75,25 C1.1
NetC1_2: C1.2 R2.1 | length 1.8
  Bottom Layer w0.25: R2.1 C1.2
NetC2_2: C2.2 R2.2 R7.2 VT3.1 | length 15.1
  Bottom Layer w0.25: R7.2 C2.2 ; R2.2 8.25,26.8 8.75,26.3 8.75,24.25 7.5,23 C2.2 ; VT3.1 13.4,22.1 13,22.5 9.5,22.5 9,22 C2.2
NetC3_2: C3.2 DA1.1 R3.2 R5.2 | length 7.6
  Bottom Layer w0.4: R3.2 R5.2 C3.2 43.25,8.3 44.23,9.28 DA1.1
NetC4_2: C4.2 DA2.1 R4.2 R6.2 | length 5.1
  Bottom Layer w0.4: R4.2 R6.2 C4.2 44.05,32.8 44.23,32.98 DA2.1
NetC5_2: C5.2 R18.2 R22.1 R23.1 VT7.1 | length 9.9
  Bottom Layer w0.2: R22.1 20.75,13.5 21,13.75 21,16.25 21.25,16.5 R23.1
  Bottom Layer w0.25: VT7.1 21.2,21.3 21.7,20.8 C5.2 R18.2 R23.1
NetC6_2: C6.2 R8.2 R14.2 R24.1 VT2.3 | length 11
  Bottom Layer w0.25: R8.2 R14.2 17.9,13.8
  Bottom Layer w0.4: VT2.3 17.9,13.8 17.9,13.6 19.5,12 C6.2 R24.1
NetC7_2: C7.2 R9.1 R12.1 R16.3 R17.1 R25.1 | length 11.3
  Bottom Layer w0.4: R12.1 R9.1 15.55,37.7 15.89,38.04 R16.3 17.71,38.04 18.05,37.7 R17.1 19.3,37.7 19.5,37.9 C7.2 R25.1
NetC8_2: C8.2 DD1.2 R19.2 R20.2 | length 5.6
  Bottom Layer w0.25: R19.2 C8.2 ; R20.2 C8.2 ; DD1.2 11.885,2.865 11.25,3.5 C8.2
NetC9_1: C9.1 R23.2 | length 1.5
  Bottom Layer w0.25: C9.1 R23.2
NetC10_2: C10.2 DD1.6 DD1.7 R21.2 | length 6.4
  Bottom Layer w0.25: DD1.7 20.165,2.865 20.5,3.2 20.5,3.5 ; DD1.6 20.5,4.135 ; R21.2 20.5,3.5 ; C10.2 20.75,5 20.5,4.75 20.5,4.135 ; 20.5,3.5 20.5,4.135
NetC11_2: C11.2 DD1.5 | length 3
  Bottom Layer w0.25: DD1.5 20.155,5.405 20.5,5.75 20.5,6.25 20.75,6.5 C11.2
NetC12_2: C12.2 R26.2 VD4.2 VT9.1 | length 5
  Bottom Layer w0.25: VT9.1 VD4.2 29.8,32.5 30.3,33 R26.2 C12.2
NetC13_2: C13.2 C16.1 R28.1 R31.2 VD2.2 VD3.2 VT11.3 | length 17.1
  Bottom Layer w0.4: R31.2 24.05,12.7 24.25,12.9 VT11.3 ; R28.1 25.3,8.55 26,9.25 26,12.5 25.6,12.9 VT11.3 ; VD2.2 27.7,19.95 26.25,18.5 VD3.2 25.3,17.75 25.6,17.45 C13.2 25.6,15.55 25.25,15.2 C16.1 24.8,14.05 VT11.3
NetC14_2: C14.2 C17.1 R32.2 VD2.1 VT9.3 VT12.3 | length 15.1
  Bottom Layer w0.4: R32.2 24.45,25.7 24.65,25.9 VT12.3 ; VT9.3 25,31 25.25,30.75 C17.1 25.25,29.3 25.6,28.95 C14.2 25.6,27.05 25.3,26.75 VT12.3 ; VD2.1 26,20.5 26.5,21 26.5,25.5 26.1,25.9 VT12.3
NetC22_2: C22.2 R43.1 VD11.2 VT17.1 | length 7.1
  Bottom Layer w0.25: R43.1 25.75,4.5 25.975,4.275 25.975,1.775 26.25,1.5 VD11.2 VT17.1 ; 26,3 C22.2
NetC23_2: C23.2 R44.2 | length 1.5
  Top Layer w0.4: C23.2 R44.2
NetC24_2: C24.2 R45.1 | length 1.5
  Top Layer w0.4: R45.1 C24.2
NetDA1_4: DA1.4 DA2.4 R19.1 | length 64.7
  Top Layer w0.25: v1(9.3,1) 41,1 44.25,4.25 v1(44.25,6.75)
  Bottom Layer w0.25: v1(9.3,1) R19.1 ; DA1.4 44.23,6.96 47.75,10.48 47.75,13.5 44.23,17.02 DA2.4 DA2.4@44.23,27.825
NetDD1_3: DD1.3 R27.1 R29.1 R30.1 | length 8.7
  Bottom Layer w0.25: DD1.3 14,4.135 14.25,4.385 14.25,8.2 ; 13.5,8.8 14.05,8.8 14.25,8.6 14.25,8.2 ; R27.1 R29.1 14.25,8.2
NetHL1_2: HL1.2 R27.2 | length 5.4
  Top Layer w0.25: v1(16.5,6) 16.5,2.5 16.85,2.15 HL1.2
  Bottom Layer w0.25: v1(16.5,6) R27.2
NetHL2_1: HL2.1 R29.2 | length 3
  Top Layer w0.25: HL2.1 v1(15,6)
  Bottom Layer w0.25: v1(15,6) R29.2
NetR1_1: R1.1 R8.1 VT2.2 VT5.1 | length 15.1
  Bottom Layer w0.25: R1.1 9.5,15.2 ; VT5.1 10,15.45 9.75,15.2 9.5,15.2 ; VT2.2 17,11.5 16.3,10.8 R8.1 13.75,10.8 13.3,11.25 10,11.25 9.5,11.75 9.5,15.2
NetR9_2: R9.2 VT1.3 | length 3.3
  Bottom Layer w0.25: R9.2 13,34.9 13.4,34.5 VT1.3
NetR10_1: R10.1 R11.3 VT3.3 | length 3.6
  Bottom Layer w0.25: VT3.3 R10.1 12.3,19.7 12.73,19.27 R11.3
NetR10_2: R10.2 R11.2 R15.1 VT5.2 | length 8.5
  Bottom Layer w0.25: VT5.2@11.5,15.8 11.5,17.4 11.6,17.5 R10.2 R15.1 R11.2
NetR11_1: R11.1 R15.2 VT7.3 | length 4.8
  Bottom Layer w0.25: R15.2 17.05,19.7 17.48,19.27 R11.1 18.54,20.25 18.6,20.31 VT7.3
NetR12_2: R12.2 R13.1 VT1.1 VT4.3 VT6.3 VT8.1 | length 21.3
  Bottom Layer w0.25: R12.2 VT1.1 11.6,32.5 12.3,31.8 R13.1 ; VT4.3 13.4,29.4 15,31 R13.1 ; VT8.1 18.6,31.8 ; VT6.3 20.4,29.4 20.75,29.75 20.75,31.25 20.2,31.8 18.6,31.8 ; R13.1 18.6,31.8
NetR13_2: R13.2 R16.1 R16.2 | length 4.5
  Bottom Layer w0.25: R16.2 14.23,34.52 15,33.75 R13.2 15.75,33.2 15.99,32.96 R16.1
NetR14_1: R14.1 VT2.1 VT5.3 | length 4.1
  Bottom Layer w0.25: VT5.3 14.05,16.25 14.5,15.8 R14.1 15.05,15.2 15.55,14.7 VT2.1
NetR17_2: R17.2 VT8.3 | length 3.8
  Bottom Layer w0.25: R17.2 18.6,35.4 20.4,33.6 VT8.3
NetR28_2: R28.2 VD5.2 | length 1.7
  Bottom Layer w0.4: R28.2 26.7,7.55 27.2,7.05 VD5.2
NetR30_2: R30.2 VT10.1 | length 1.9
  Bottom Layer w0.25: VT10.1 12,10.4 12.2,10.2 R30.2
NetR31_1: R31.1 VD6.2 VT6.2 VT11.1 | length 20.1
  Bottom Layer w0.25: VT6.2 19.5,25.75 22.5,22.75 22.5,11.55 22.75,11.3 R31.1 24.05,11.3 24.25,11.1 VT11.1 VD6.2
NetR32_1: R32.1 VD7.2 VT4.2 VT12.1 | length 15.3
  Top Layer w0.25: v1(18,25) v1(21.25,25)
  Bottom Layer w0.25: VT4.2 15.95,26.3 17.25,25 v1(18,25) ; v1(21.25,25) 22.25,25 22.95,24.3 R32.1 24.45,24.3 24.65,24.1 VT12.1 VD7.2
NetR33_1: R33.1 VD8.1 VT10.2 | length 4.8
  Bottom Layer w0.25: VD8.1 VT10.2 8.8,8.45 9.3,7.95 R33.1
NetR34_1: R34.1 VD6.1 VT11.2 | length 4.3
  Bottom Layer w0.4: VT11.2 VD6.1 27.75,9.5 28.25,10 R34.1
NetR34_2: R34.2 R37.2 VD9.1 VT14.1 | length 4.9
  Bottom Layer w0.4: VD9.1 29.85,11.3 30.15,11.6 VT14.1 30.8,11.05 30.2,10.45 R34.2 R37.2
NetR35_1: R35.1 VD7.1 VT12.2 | length 10
  Bottom Layer w0.4: VD7.1 VT12.2 29.5,25 30.5,26 30.5,28.25 29.8,28.95 R35.1
NetR35_2: R35.2 R38.2 VD10.1 VT15.1 | length 4.8
  Bottom Layer w0.4: R38.2 R35.2 31.2,29.3 31.7,28.8 VT15.1 32.5,28.4 32.8,28.7 VD10.1
NetR36_2: R36.2 VD8.2 VT13.1 | length 4.3
  Bottom Layer w0.25: VD8.2 5.95,9.5 6.7,10.25 R36.2 6.7,11.45 6.9,11.65 VT13.1
NetR39_1: R39.1 VD9.2 VT14.3 | length 3.3
  Bottom Layer w0.4: VD9.2 29.8,13.7 30.1,13.4 VT14.3 R39.1
NetR39_2: R39.2 VT16.4 | length 2.5
  Bottom Layer w0.4: R39.2 30.8,17.35 VT16.4
NetR40_1: R40.1 VD10.2 VT15.3 | length 3.3
  Bottom Layer w0.4: R40.1 VT15.3 32.4,26.6 32.7,26.3 VD10.2
NetR40_2: R40.2 VT16.2 | length 2.1
  Bottom Layer w0.4: R40.2 31.7,21.75 VT16.2
NetVD1_1: VD1.1 VD1.3 VT1.2 VT3.2 VT4.1 | length 13.7
  Bottom Layer w0.25: VT1.2 12.5,30.25 11.6,29.35 VT4.1 11.6,25.5 12.5,24.6 VT3.2 13.55,23.7 15.1,22.15 VD1.3 VD1.1
NetVD1_2: VD1.2 VT6.1 VT7.2 VT8.2 | length 11.3
  Bottom Layer w0.25: VD1.2 VT7.2 19.5,24.75 18.6,25.65 VT6.1 18.6,29.35 19.5,30.25 VT8.2
OUT: C13.1 C16.2 L1.1 R37.1 R44.1 R45.2 VD3.1 VT14.2 VT16.3 | length 23
  Top Layer w0.4: R44.1 36.6,18 ; 36.6,22 R45.2
  Bottom Layer w0.4: R37.1 32.7,10.95 33.2,11.45 VT14.2 28.75,12.5 27.75,13.5 C16.2 27.75,15.15 27.4,15.5 C13.1 27.4,17.45 27.7,17.75 VD3.1 28.75,18.5 30.25,20 VT16.3
OUT_LP: C9.2 C30.2 L1.2 pad.0@71,17.5 R22.2 XT2.1 | length 61.3
  Top Layer w0.25: v1(21.7,12.75) 31,12.75 31.75,13.5 53,13.5 56.5,17 66,17 68.5,19.5 76,19.5 77,18.5 77,18
  Bottom Layer w0.25: v1(21.7,12.75) R22.2 C9.2
VCC: C25.1 C27.1 R3.1 R24.2 R41.2 R43.2 VD5.1 VT17.2 XT1.1 | length 15.8
  Bottom Layer w0.4: R24.2 22.4,9.6 23.75,8.25 23.75,6 24.25,5.5 24.75,5.5 ; VD5.1 24.8,5.55 24.75,5.5 ; R43.2 27.5,4.5 ; VT17.2@29.45,3 27.75,3 27.5,3.25 27.5,4.5 ; 41,5 R3.1 ; 24.75,5.5 27.25,5.5 27.5,5.25 27.5,4.5
VCC12P0: C15.2 C29.2 DD1.4 DD1.8 HL1.1 R20.1 R21.1 R33.2 VT17.3 | length 33.9
  Top Layer w0.25: v1(13.5,7.5) v1(15.75,7.5) ; HL1.1 v1(17.5,4.75)
  Top Layer w0.4: v1(23.75,3.5) 26.75,6.5 v1(28.25,6.5)
  Bottom Layer w0.25: R20.1 9.75,5 10,5.25 10,6.25 10.25,6.5 R33.2 13,6.5 ; DD1.4 13,6.5 ; v1(13.5,7.5) 13,7 13,6.5 ; v1(15.75,7.5) 17.25,7.5 17.5,7.25 v1(17.5,4.75) 17.5,2 17.905,1.595 DD1.8
  Bottom Layer w0.4: DD1.8 20.095,1.595 20.5,2 C15.2 21.75,2 21.998,2.248 21.998,2.999 22.002,3.004 22.002,3.25 22.252,3.5 R21.1 v1(23.75,3.5) ; v1(28.25,6.5) C29.2 29.1,5.55 29,5.45 VT17.3
VCC_PROT: C3.1 C18.1 C19.1 C23.1 DA1.2 R5.1 R41.1 VT16.5 | length 12.4
  Top Layer w0.4: 35.25,15.5 C23.1
  Bottom Layer w0.4: 40,9.7 R5.1 C3.1 42.5,12.25 43.5,13.25 46.52,13.25 46.77,13 DA1.2
VSS: C4.1 C26.2 C28.2 DA2.2 R6.1 R25.2 R42.1 XT5.1 | length 15.4
  Bottom Layer w0.4: R25.2 23.6,36.1 26,38.5 34,38.5 ; R6.1 41,35 ; C4.1 42.5,35 ; DA2.2 46.77,35
VSS_PROT: C12.1 C14.1 C17.2 C20.1 C21.2 C24.1 R4.1 R38.1 R42.2 VD4.1 VT15.2 VT16.1 | length 25.2
  Top Layer w0.4: VT16.1@35.25,24.5 C24.1
  Bottom Layer w0.4: VT15.2 28.5,27.5 28,28 C14.1 27.4,28.9 27.75,29.25 C17.2 28.25,30 29.25,31 32.2,31 VD4.1 ; C12.1 32.5,35 33.25,34.25 33.25,31 ; 32.25,31 33.25,31 ; R38.1 33.7,31 ; R42.2 35.6,29.9 34.5,31 33.7,31 ; 40,30.3 R4.1 ; 33.25,31 33.7,31
pads on no net: VT16.0 WW1.MH WW2.MH WW3.MH WW4.MH

## Polygon pours and split planes (outlines as drawn)
GND on Bottom Layer "GND_L02_P018" (solid, remove dead copper, pour order 18): 80,40 65,40 65,33 48.5,33 48,32.5 48,7.5 48.5,7 65,7 65,0 80,0
VSS_PROT on Bottom Layer "Bottom Layer-VSS_PROT" (solid, pour order 6): 33,23 34,22 36.5,22 39,24.5 39,28.5 40,29.5 40,30.5 39.5,31 36.5,31 36,30.5 36,27.5 33.5,25 33,24.5
VSS on Bottom Layer "Bottom Layer-VSS" (solid, pour order 4): 65,39 66,38 66,34 65,33 48.5,33 48,33.5 48,34.5 47.5,35 45,35 35,35 34,36 34,39
VCC on Bottom Layer "Bottom Layer-VCC" (solid, pour order 2): 65,1 66,2 66,6 65,7 48.5,7 48,6.5 48,5.5 47.5,5 45,5 31,5 30,4 30,1
VCC_PROT on Bottom Layer "Bottom Layer-VCC_PROT" (solid, pour order 0): 33,17 34,18 36.5,18 39,15.5 39,11.5 40,10.5 40,9.5 39.5,9 36.5,9 36,9.5 36,12.5 33,15.5
GND on Top Layer "Top Layer-GND" (solid, remove dead copper, pour order 16): 0,40 0,0 80,0 80,40
OUT on Top Layer "Top Layer-OUT" (solid, pour order 8): 33,19 34,18 43,18 48,23 63.5,23 64,23.5 64,26.5 62.5,28 45.5,28 39.5,22 34,22 33,21
VCC_PROT on Top Layer "Top Layer-VCC_PROT" (solid, pour order 14): 35.25,17 35.25,14 35,13.75 33.5,13.75 33.25,14 33.25,17
VSS_PROT on Top Layer "Top Layer-VSS_PROT" (solid, pour order 12): 33.25,22.75 33.25,25.75 33.5,26 35,26 35.25,25.75 35.25,22.75
OUT_LP on Top Layer "Top Layer-OUT_LP" (solid, pour order 10): 57.5,16 58,16.5 66.5,16.5 69,19 74.5,19 75.5,18 78,18 78.5,17.5 78.5,10.5 78,10 58,10 57.5,10.5

## Keep-outs
Top Layer:
  circle w0.1: c50.75,20 r3.5
  lines w0.1: 0,8 4,8 cw(c4,4) 8,4 8,0 ; 0,32 4,32 ccw(c4,36) 8,36 8,40 ; 72,0 72,4 cw(c76,4) 76,8 80,8 ; 72,40 72,36 ccw(c76,36) 76,32 80,32 ; 58.46,1.25 cw(c58.46,3) 58.46,4.75 63.54,4.75 cw(c63.54,3) 63.54,1.25 58.46,1.25 ; 58.46,35.25 cw(c58.46,37) 58.46,38.75 63.54,38.75 cw(c63.54,37) 63.54,35.25 58.46,35.25
Bottom Layer:
  circle w0.1: c50.75,20 r3.5
  lines w0.1: 72,0 72,4 cw(c76,4) 76,8 80,8 ; 72,40 72,36 ccw(c76,36) 76,32 80,32

## Silkscreen, mask and mechanical layers (free items; w line width, h text height)
Top Overlay:
  lines w0.25: 42,19.625 46.5,19.625 45.5,18.625 ; 42,20.375 46.5,20.375 45.5,21.375
  text "1838" at 32.5,5 h3
  text "A_D" at 33.75,3.5 h2
1 - Board Outline:
  the board outline again, w0.1